# EAGLE board circuit2 (EAGLE 9.6.2)
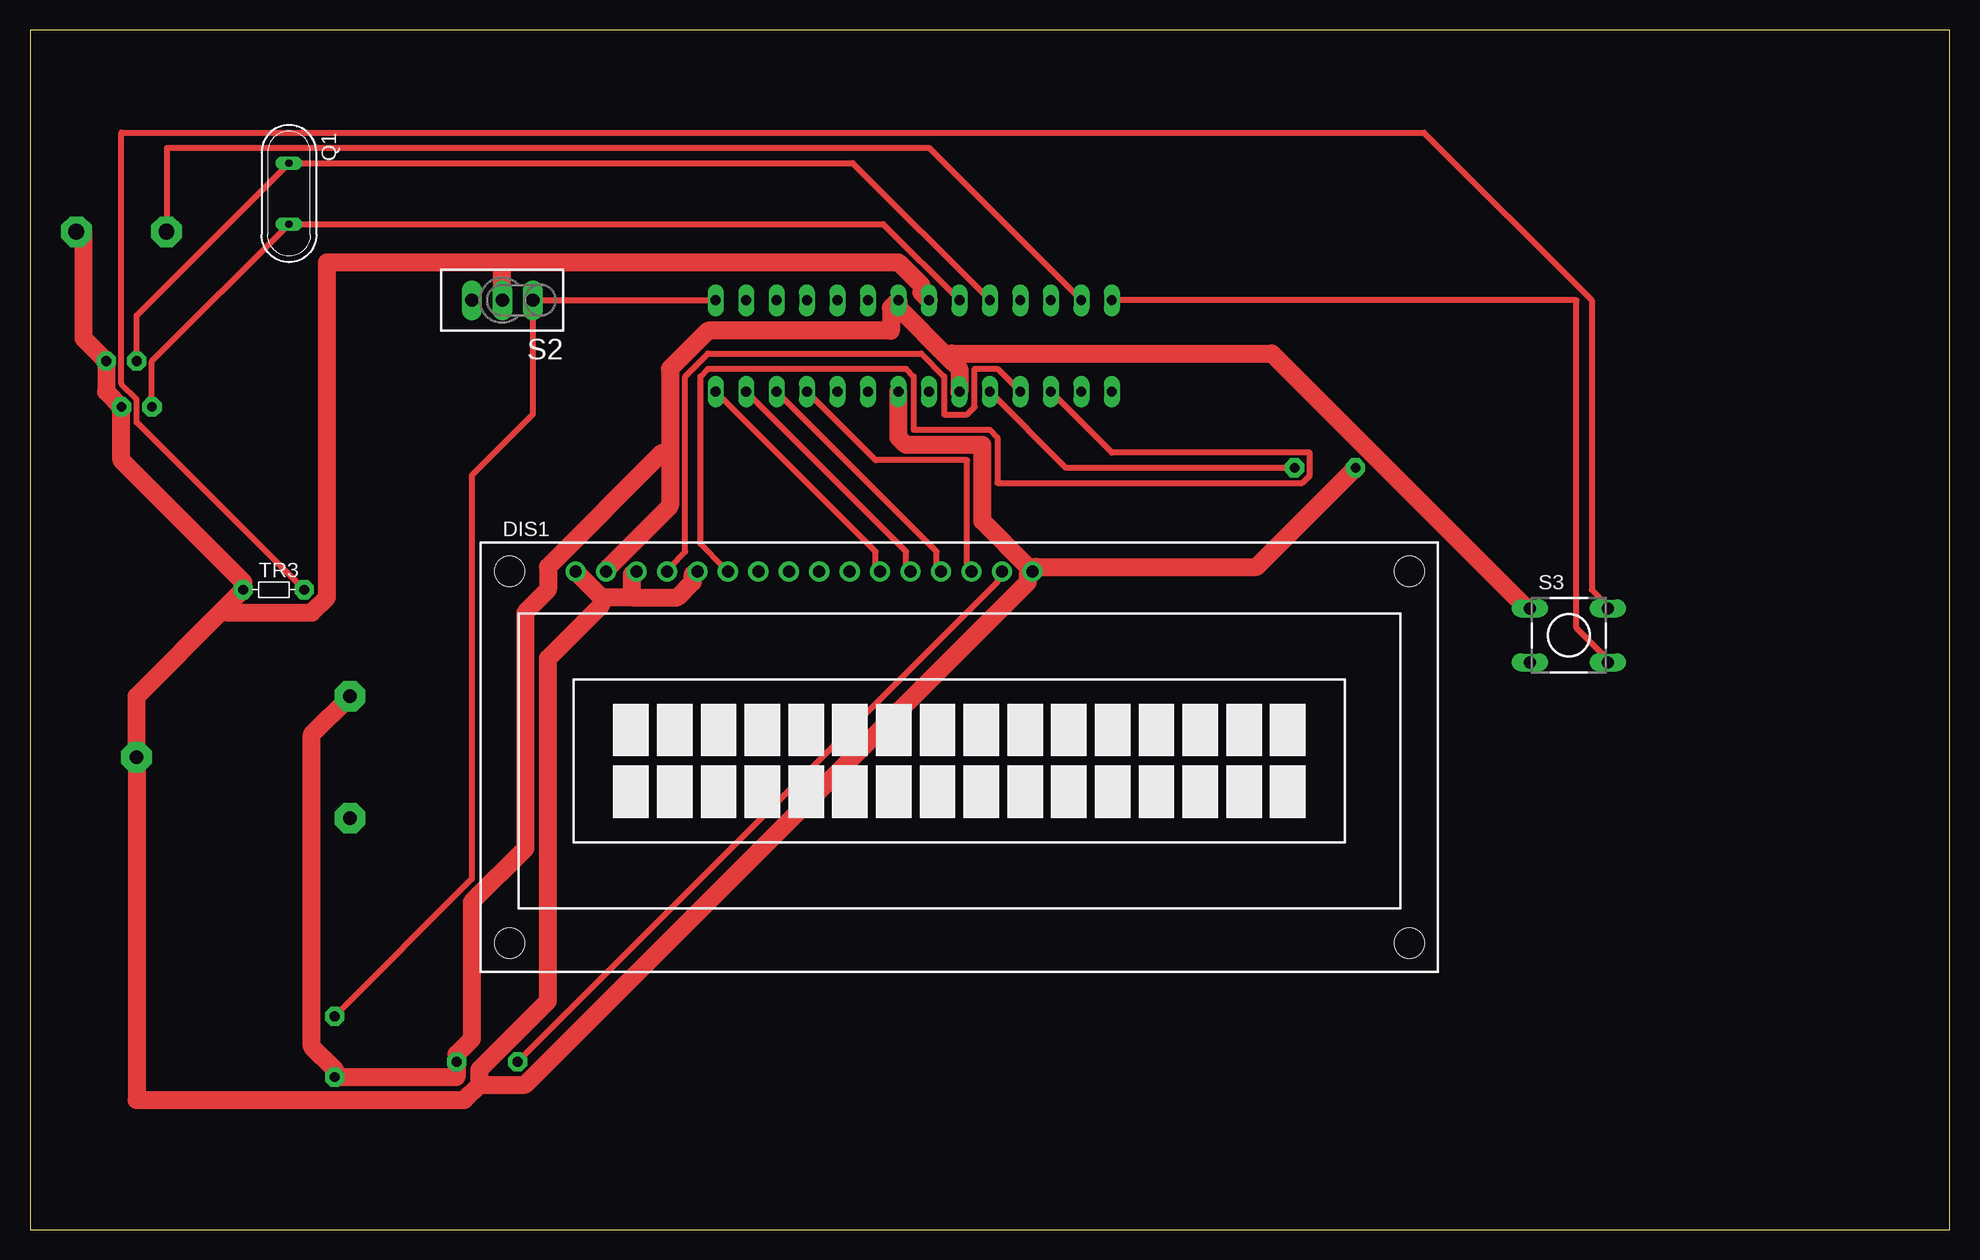
[diagram p0: board, top side]
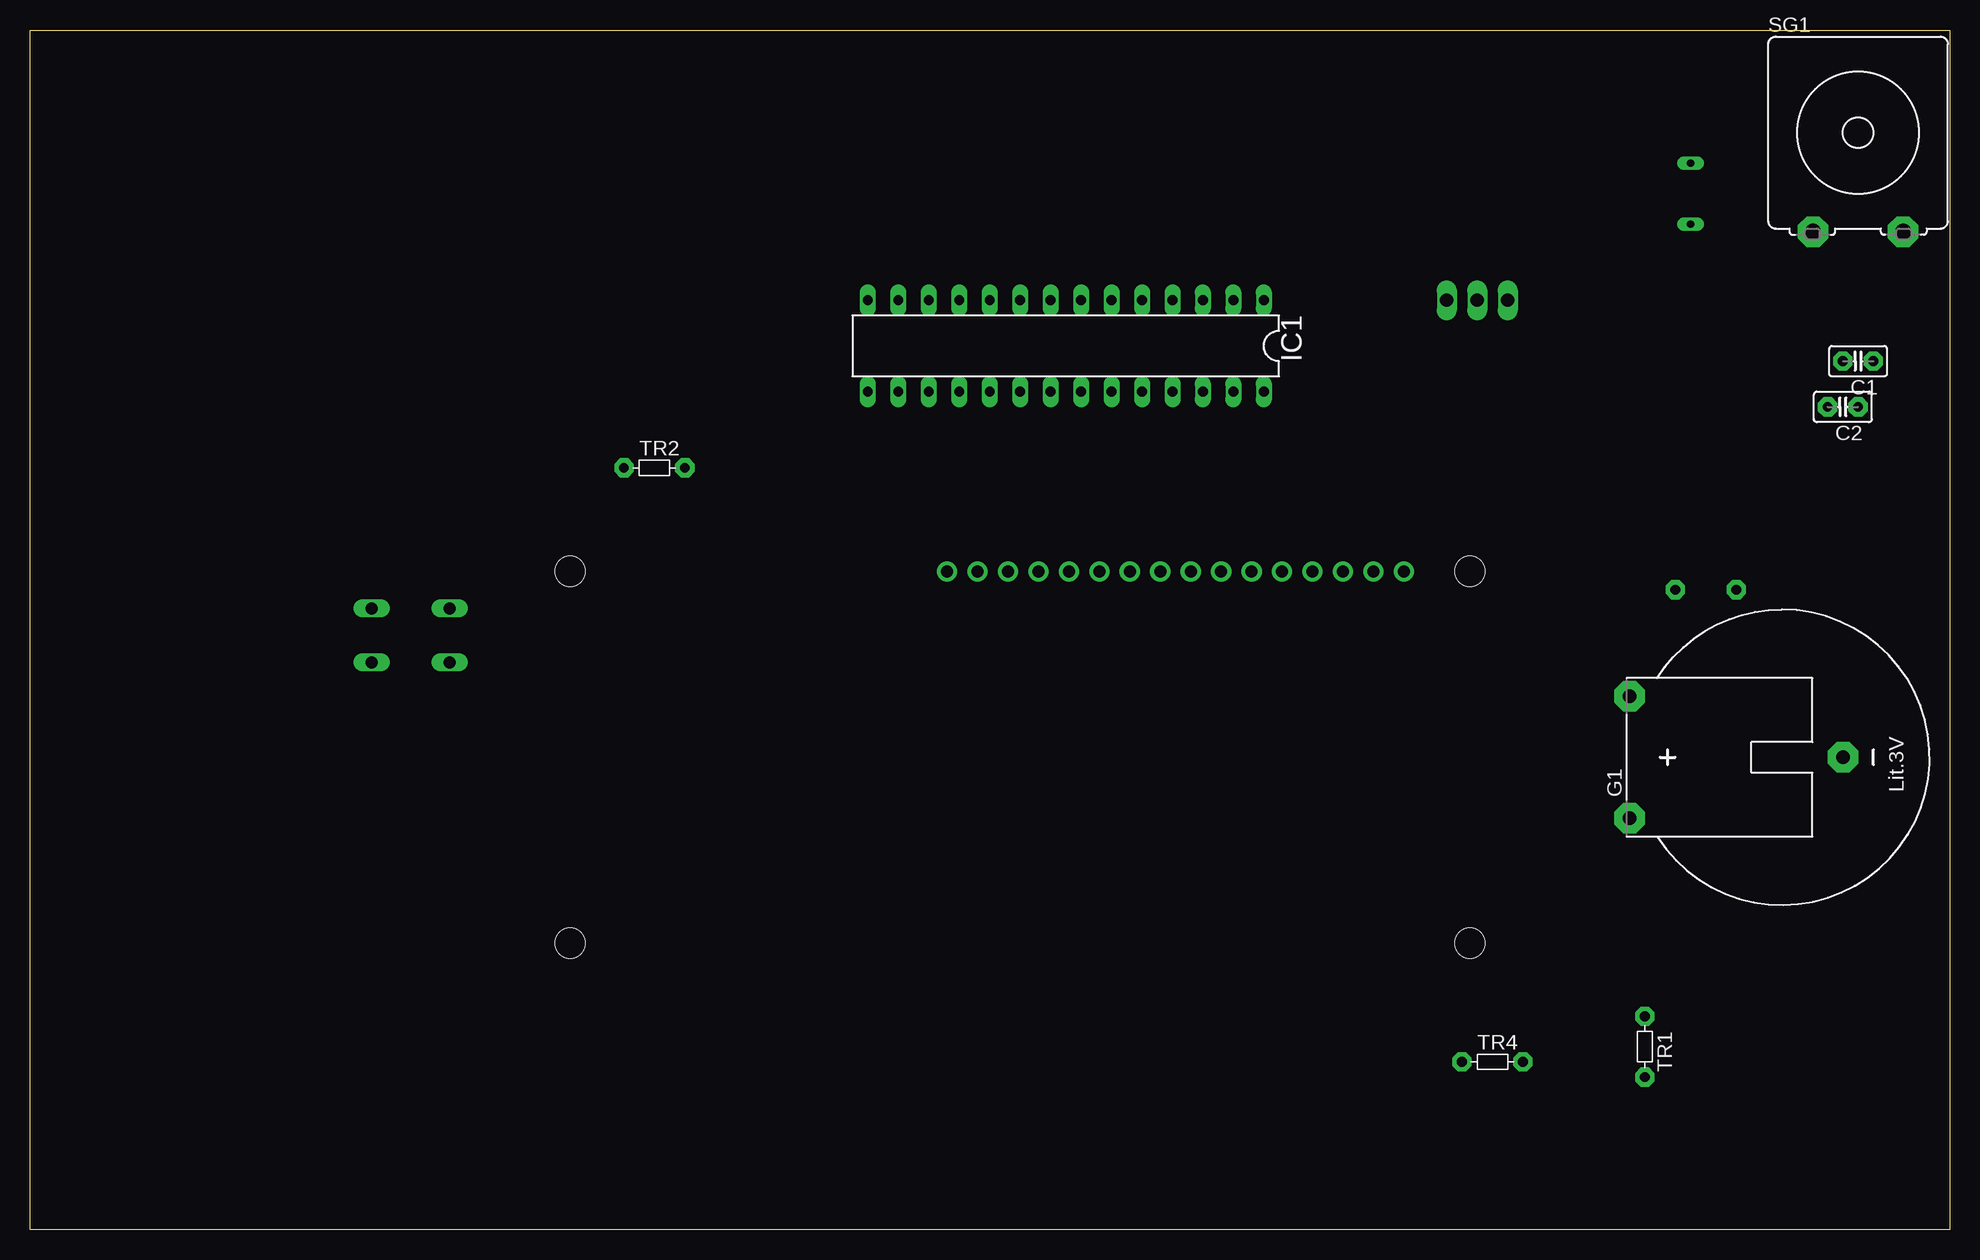
[diagram p1: board, bottom side, seen from below]

Size 160 x 100 mm. Coordinates in mm from the lower left corner, seen from the top.
Outline: 0,0 160,0 160,100 0,100 0,0
Copper layers (1*16): Top 0.035mm / dielectric 1.5mm / Bottom 0.035mm
Design rules "default": minimum track width 6mil, minimum drill 0.35mm, track to track 6mil, track to pad 6mil, pad to pad 6mil, via to via 6mil, smd to smd 6mil, copper to edge 40mil, drill to drill 6mil, minimum pad ring 10mil, minimum via ring 8mil, stop-mask expansion 4mil, vias tented up to drill 0mil, thermal gap 10mil
Net classes: 0 default: width 0.5 mm; 1 New Class: width 1.5 mm

## Footprints (pad centres in the part's own frame; a part is rotated, then mirrored left to right if it is on the bottom)
C2.5-2 = drill 0.813 pad 1.6 octagon: 1 -1.27,0; 2 1.27,0
TUXGR_16X2_R2 = drill 1 pad 1.676: 1 -32,15.5; 2 -29.46,15.5; 3 -26.92,15.5; 4 -24.38,15.5; 5 -21.84,15.5; 6 -19.3,15.5; 7 -16.76,15.5; 8 -14.22,15.5; 9 -11.68,15.5; 10 -9.14,15.5; 11 -6.6,15.5; 12 -4.06,15.5; 13 -1.52,15.5; 14 1.02,15.5; 15 3.56,15.5; 16 6.1,15.5 | hole 2.5: -37.5,-15.5; 37.5,-15.5; -37.5,15.5; 37.5,15.5
CR2430H = drill 1.118 pad 2.54 octagon: + 5.08,12.7; +@1 -5.08,12.7; - 0,-5.08
DIL28-3 = drill 0.813 long: 1 -16.51,-3.81; 2 -13.97,-3.81; 3 -11.43,-3.81; 4 -8.89,-3.81; 5 -6.35,-3.81; 6 -3.81,-3.81; 7 -1.27,-3.81; 8 1.27,-3.81; 9 3.81,-3.81; 10 6.35,-3.81; 11 8.89,-3.81; 12 11.43,-3.81; 13 13.97,-3.81; 14 16.51,-3.81; 15 16.51,3.81; 16 13.97,3.81; 17 11.43,3.81; 18 8.89,3.81; 19 6.35,3.81; 20 3.81,3.81; 21 1.27,3.81; 22 -1.27,3.81; 23 -3.81,3.81; 24 -6.35,3.81; 25 -8.89,3.81; 26 -11.43,3.81; 27 -13.97,3.81; 28 -16.51,3.81
QS = drill 0.61 long: 1 -2.54,0; 2 2.54,0
TL3XPO = drill 1.1 pad 1.422 long: 1 -2.54,0; 2 0,0; 3 2.54,0
DTS-6 = drill 1 long: 1 -3.25,2.25; 2 3.25,2.25; 3 -3.25,-2.25; 4 3.25,-2.25
B/C11L = drill 1.321 pad 2.54 octagon: 1 -3.759,-8.255; 2 3.759,-8.255
R-5 = drill 0.813 pad 1.6 octagon: 1 -2.54,0; 2 2.54,0

## Placement (x,y rotation side)
C1  [C2.5-2]  7.62,72.39 180 bottom
C2  [C2.5-2]  8.89,68.58 180 bottom
DIS1  TUXGR_16X2_R2  [TUXGR_16X2_R2]  77.47,39.37 0 top
G1  CR2430H  [CR2430H]  13.97,39.37 90 bottom
IC1  ATMEGA328-20P  [DIL28-3]  73.66,73.66 180 bottom
Q1  [QS]  21.59,86.36 270 top
S2  TL32PO  [TL3XPO]  39.37,77.47 180 top
S3  DTS-6  [DTS-6]  128.27,49.53 0 top
SG1  B/C11L  [B/C11L]  7.62,91.44 0 bottom
TR1  10k  [R-5]  25.4,15.24 270 bottom
TR2  [R-5]  107.95,63.5 0 bottom
TR3  [R-5]  20.32,53.34 0 top
TR4  [R-5]  38.1,13.97 0 bottom

## Library data of the parts
C1 C2 = capacitor-wima
DIS1 = display-lcd; OC_FARNELL: unknown; OC_NEWARK: unknown
G1 = battery
IC1 = atmega328
Q1 = special
S2 = switch
S3 = switch-tact
SG1 = buzzer; OC_FARNELL: unknown; OC_NEWARK: unknown
TR1-TR4 = discrete

## Nets
GND [New Class]: C1.1 C2.1 DIS1.1 DIS1.3 DIS1.5 DIS1.16 G1.- IC1.8 IC1.22 S2.2 SG1.2 TR2.1 TR3.1
N$1: IC1.13 SG1.1
N$4: IC1.1 S2.1 TR1.1
N$5: C1.2 IC1.10 Q1.1
N$6: C2.2 IC1.9 Q1.2
N$7: IC1.19 TR2.2
N$8: DIS1.15 TR4.1
N$9: DIS1.4 IC1.18
N$10: DIS1.6 IC1.17
N$11: DIS1.11 IC1.28
N$12: DIS1.12 IC1.27
N$13: DIS1.13 IC1.26
N$15: DIS1.14 IC1.25
N$16: IC1.16
N$17: S3.2 TR3.2
N$19: IC1.14 S3.4
VCC [New Class]: DIS1.2 G1.+ IC1.7 IC1.20 S3.1 TR1.2 TR4.2

## Tracks (layer width: path | path; a pad name or v marks a point on that pad's centre or on a via)
GND
  Top 1.5: IC1.22 72.39,66.04 73.03,65.41 79.38,65.41 79.38,59.05 83.19,55.24 DIS1.16 | TR2.1 102.23,55.24 83.82,55.24 DIS1.16 | IC1.8 74.3,78.11 74.3,78.74 72.39,80.64 39.37,80.64 | S2.2 39.37,80.64 | SG1.2 4.45,83.19 4.45,74.3 C1.1 6.35,69.85 C2.1 7.62,64.14 17.78,53.98 TR3.1 16.19,51.75 | 47.62,52.7 45.72,54.61 DIS1.1 | 50.16,52.7 47.62,52.7 | 50.16,52.7 50.16,54.61 DIS1.3 | 50.16,52.7 53.98,52.7 55.24,53.98 55.24,54.61 DIS1.5 | 16.19,51.75 8.89,44.45 G1.- 8.89,10.79 36.2,10.79 37.47,12.06 | 37.47,12.06 37.47,13.34 43.18,19.05 43.18,47.62 47.62,52.07 47.62,52.7 | 39.37,80.64 24.77,80.64 24.77,52.7 23.5,51.44 16.51,51.44 16.19,51.75 | 37.47,12.06 41.27,12.06 83.19,53.98 83.19,54.61 DIS1.16
N$1
  Top 0.5: IC1.13 74.93,90.17 11.43,90.17 11.43,83.19 SG1.1
N$4
  Top 0.5: IC1.1 S2.1 41.91,67.94 36.83,62.87 36.83,29.21 TR1.1
N$5
  Top 0.5: C1.2 8.89,76.2 Q1.1 68.58,88.9 IC1.10
N$6
  Top 0.5: C2.2 10.16,72.39 Q1.2 71.12,83.82 IC1.9
N$7
  Top 0.5: IC1.19 86.36,63.5 TR2.2
N$8
  Top 0.5: TR4.1 80.64,53.98 80.64,54.61 DIS1.15
N$9
  Top 0.5: IC1.18 80.64,71.75 78.74,71.75 78.74,68.58 78.11,67.94 76.2,67.94 76.2,71.12 74.3,73.03 56.52,73.03 54.61,71.12 54.61,56.52 53.34,55.24 DIS1.4
N$10
  Top 0.5: IC1.17 90.17,64.77 106.68,64.77 106.68,62.87 106.05,62.23 80.64,62.23 80.64,66.04 80.01,66.67 73.66,66.67 73.66,71.12 73.03,71.75 56.52,71.75 55.88,71.12 55.88,57.15 57.78,55.24 DIS1.6
N$11
  Top 0.5: IC1.28 70.48,56.52 70.48,55.24 DIS1.11
N$12
  Top 0.5: IC1.27 73.03,56.52 73.03,55.24 DIS1.12
N$13
  Top 0.5: IC1.26 75.56,56.52 75.56,55.24 DIS1.13
N$15
  Top 0.5: IC1.25 70.48,64.14 78.11,64.14 78.11,55.24 DIS1.14
N$17
  Top 0.5: TR3.2 8.89,67.31 8.89,69.22 7.62,70.48 7.62,91.44 116.2,91.44 130.18,77.47 130.18,53.34 131.44,52.07 S3.2
N$19
  Top 0.5: IC1.14 128.91,77.47 128.91,50.16 131.44,47.62 S3.4
VCC
  Top 1.5: G1.+ 23.5,41.27 23.5,15.24 25.4,13.34 TR1.2 35.56,12.7 TR4.2 35.56,14.61 36.83,15.88 36.83,27.3 41.27,31.75 41.27,51.44 43.18,53.34 43.18,55.24 52.7,64.77 53.34,64.77 | IC1.20 77.47,71.75 76.52,72.71 | 76.52,72.71 72.39,76.83 IC1.7 71.75,76.83 71.75,74.93 56.52,74.93 53.34,71.75 53.34,64.77 | S3.1 124.46,52.07 103.5,73.03 76.83,73.03 76.52,72.71 | 53.34,64.77 53.34,60.33 48.26,55.24 DIS1.2